# EAGLE board Car (EAGLE 7.4.0)
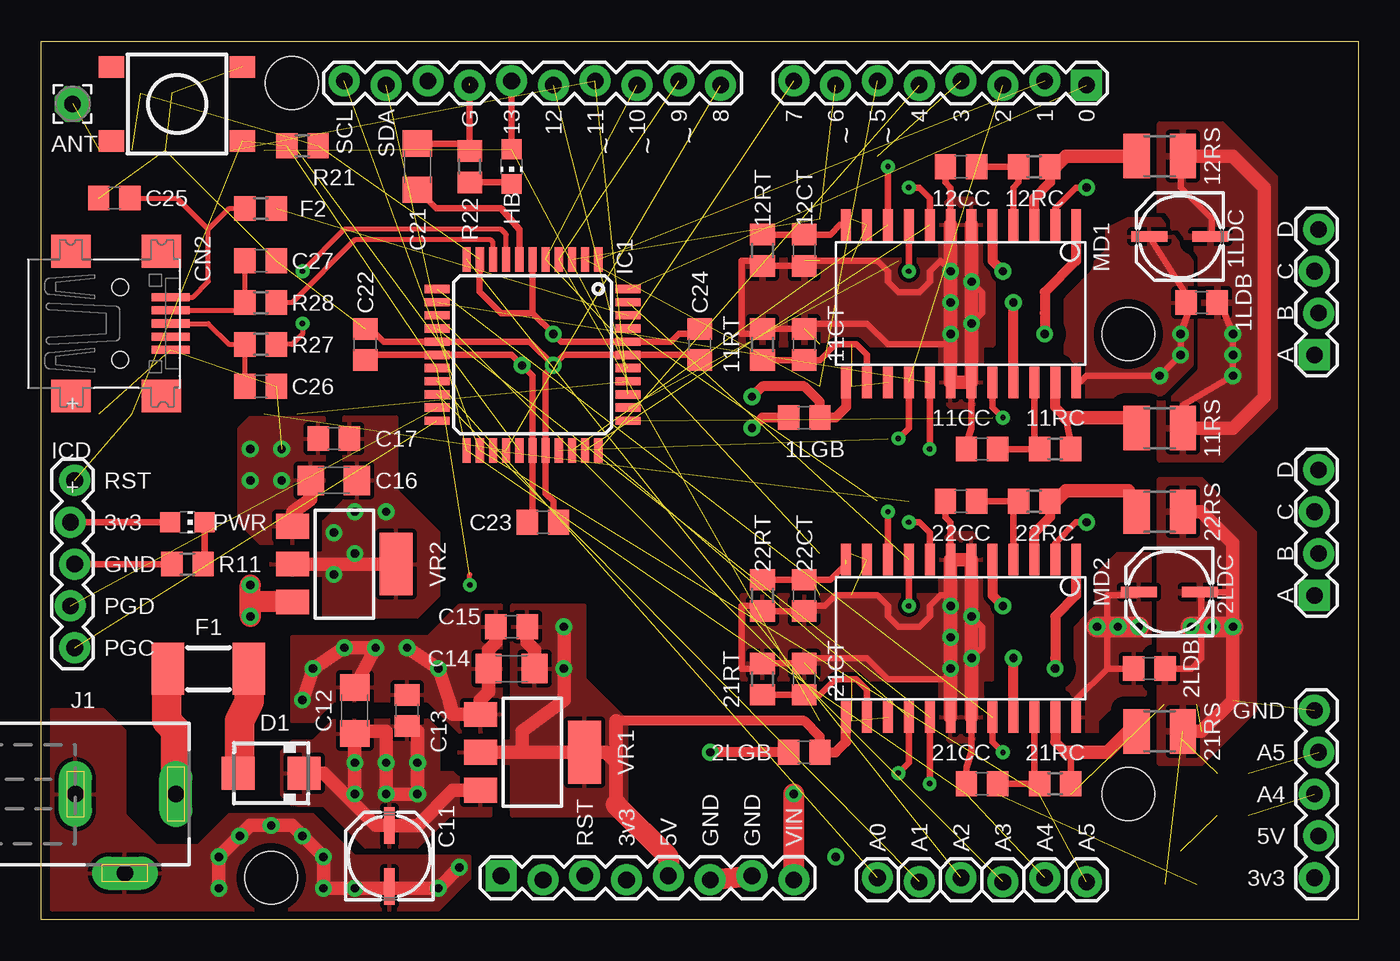
[diagram p0: board, top side]
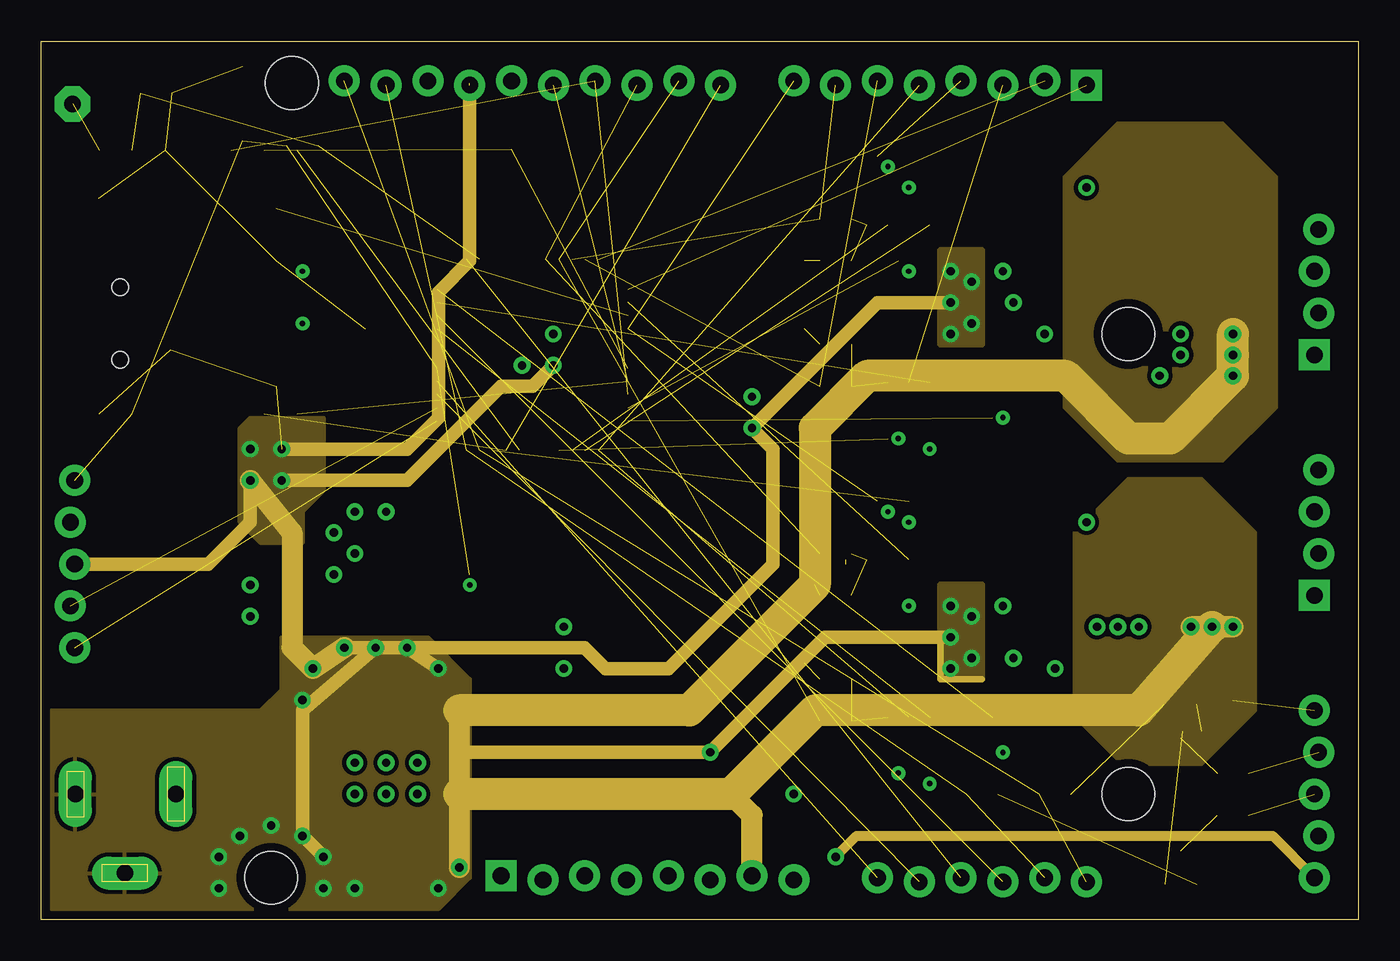
[diagram p1: board, inner layer Route2]
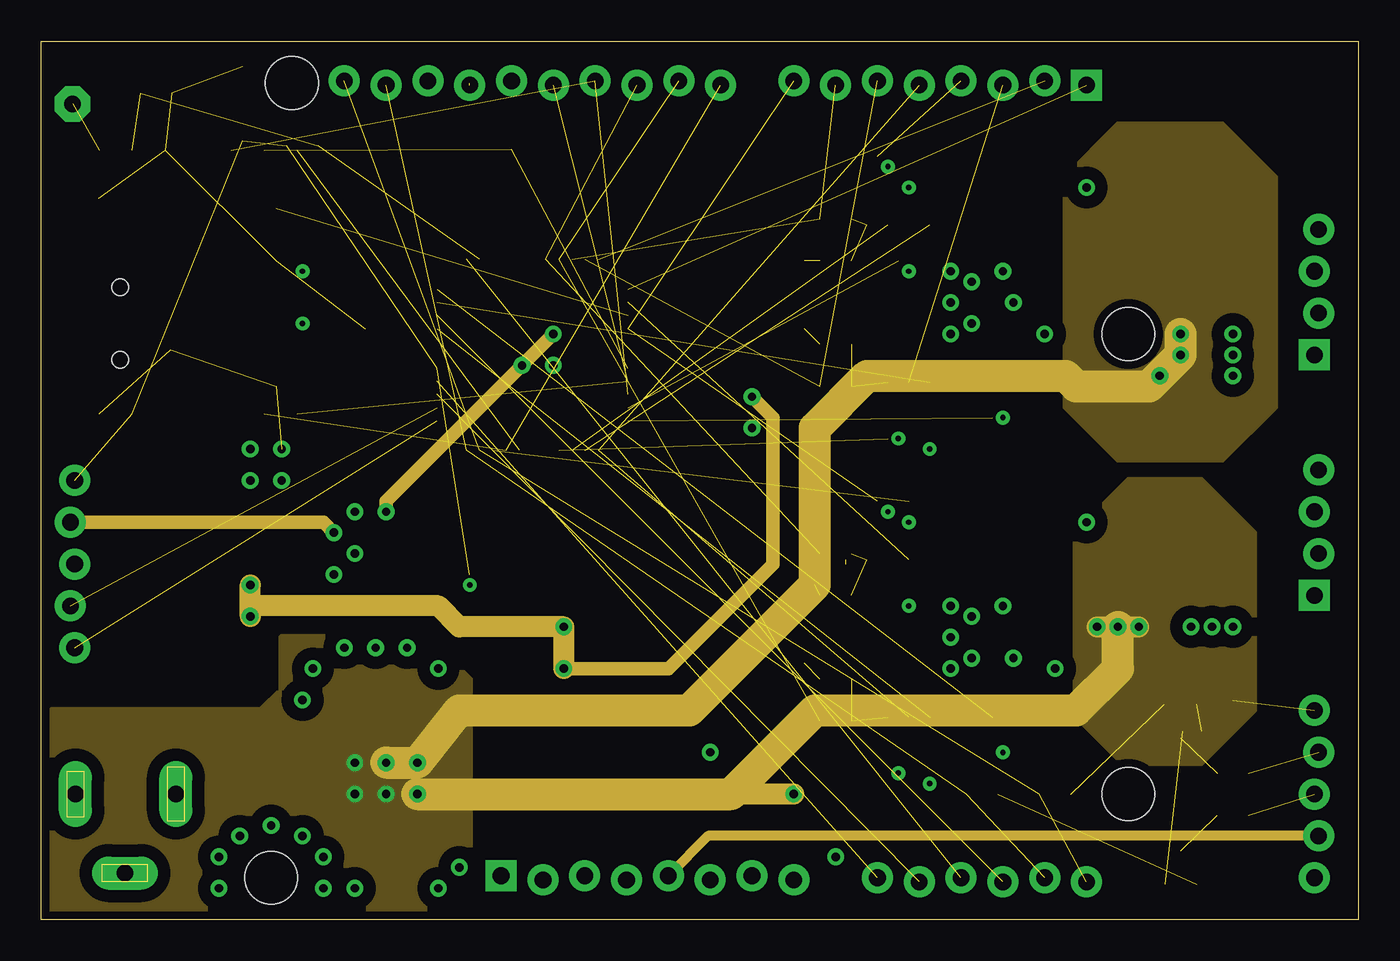
[diagram p2: board, inner layer Route15]
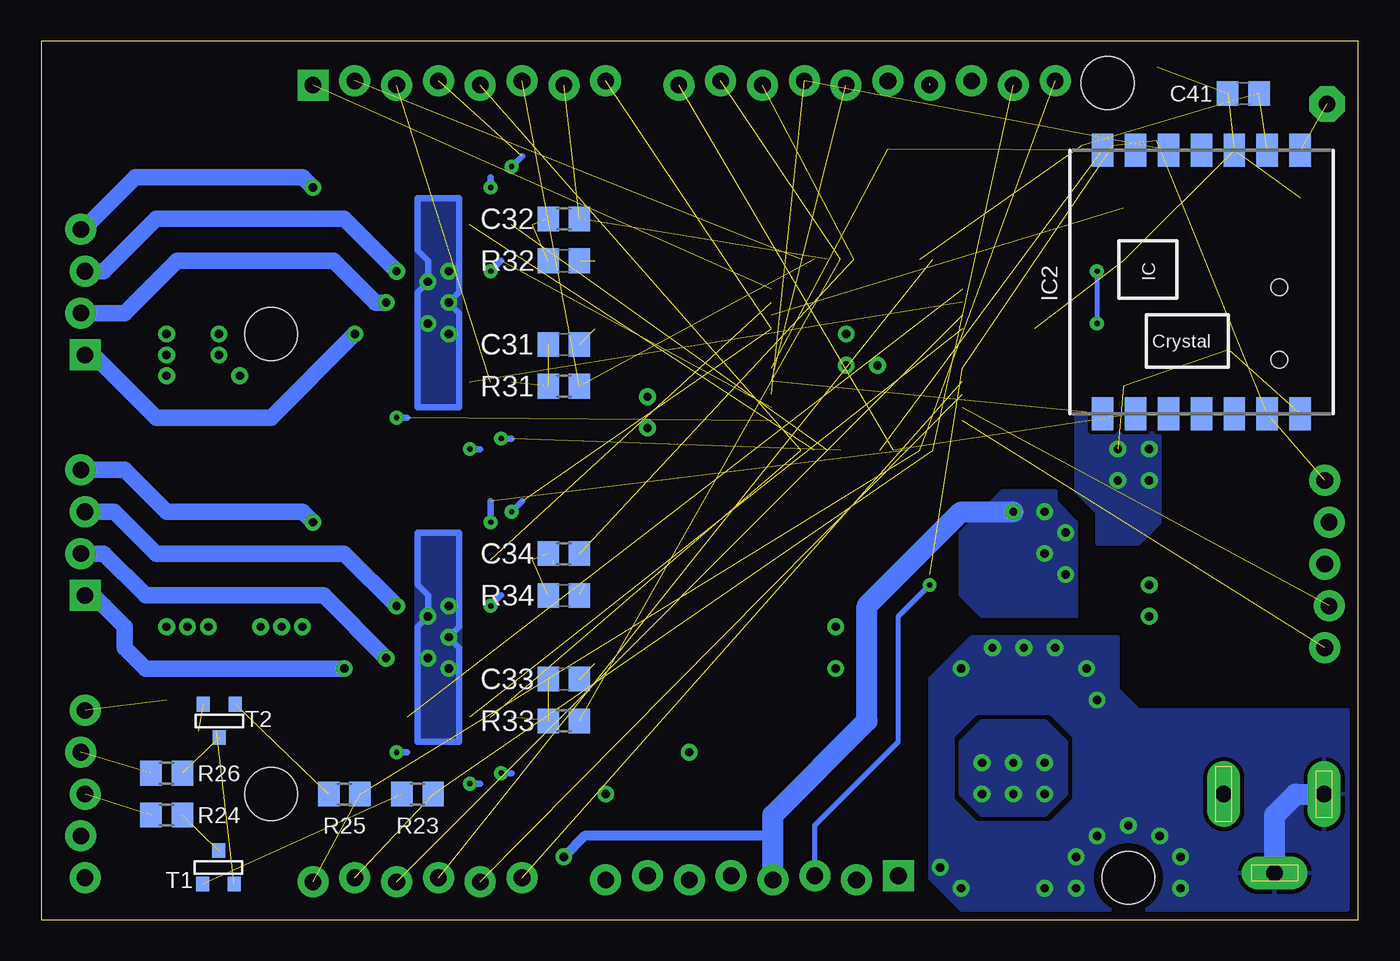
[diagram p3: board, bottom side, seen from below]

Size 80.01 x 53.34 mm. Coordinates in mm from the lower left corner, seen from the top.
Outline: 0,53.34 80.01,53.34 80.01,0 0,0 0,53.34
Copper layers (1*2*15*16): Top 0.035559375mm / dielectric 0.17018125mm / Route2 0.01778125mm / dielectric 47mil / Route15 0.01778125mm / dielectric 0.17018125mm / Bottom 0.035559375mm
Design rules "Car": minimum track width 12mil, minimum drill 13mil, track to track 10mil, track to pad 10mil, pad to pad 8mil, via to via 10mil, smd to smd 8mil, copper to edge 20mil, drill to drill 10mil, minimum pad ring 10mil, minimum via ring 10mil, stop-mask expansion 3mil, vias tented up to drill 25mil, thermal gap 10mil
Net classes: 1 power: width 0.762 mm, drill 0.508 mm, clearance 0.762 mm; 2 ground: width 0.508 mm, drill 0.381 mm
Holes 3.2 mm at 15.24,50.8 13.97,2.54 66.04,35.56 66.04,7.62

## Footprints (pad centres in the part's own frame; a part is rotated, then mirrored left to right if it is on the bottom)
C0805 = smd 1.3 x 1.5: 1 -0.95,0; 2 0.95,0
PANASONIC_C = smd 2.2 x 0.65: + 1.9,-0.2; - -1.8,-0.2
R0805 = smd 1.3 x 1.5: 1 -0.95,0; 2 0.95,0
R1210 = smd 1.6 x 2.7: 1 -1.4,0; 2 1.4,0
1X06_LOCK = drill 1.016 pad 1.88: 1 0,0; 2 2.54,-0.254; 3 5.08,0; 4 7.62,-0.254; 5 10.16,0; 6 12.7,-0.254
2,15/1,0 = drill 1.016 pad 2.159 octagon: 1 0,0
C1206 = smd 1.6 x 1.8: 1 -1.4,0; 2 1.4,0
USB-MINIB = smd 0.5 x 2.308: D+ 0,4.064; D- -0.8,4.064; GND 1.6,4.064; ID 0.8,4.064; VBUS -1.6,4.064 | smd 2 x 2.4: GND1 -4.4,-2; GND2 -4.4,3.5; GND3 4.4,3.5; GND4 4.4,-2 | hole 1: -2.2,1; 2.2,1
SMA = smd 2 x 2: A 2,0; C -2,0
1X08_LOCK = drill 1.016 pad 1.88 square: 1 0,0.127 | drill 1.016 pad 1.88: 2 2.54,-0.127; 3 5.08,0.127; 4 7.62,-0.127; 5 10.16,0.127; 6 12.7,-0.127; 7 15.24,0.127; 8 17.78,-0.127
1X10_LOCK = drill 1.016 pad 1.88: 1 0,0.127; 2 2.54,-0.127; 3 5.08,0.127; 4 7.62,-0.127; 5 10.16,0.127; 6 12.7,-0.127; 7 15.24,0.127; 8 17.78,-0.127; 9 20.32,0.127; 10 22.86,-0.127
2SMD-24X06 = smd 1.956 x 3.15: P$1 -2.464,0; P$2 2.464,0
0805 = smd 1.3 x 1.5: 1 -0.95,0; 2 0.95,0
CHIP-LED0805 = smd 1.2 x 1.2: A 0,-1.05; C 0,1.05
TQFP44 = smd 1.5 x 0.5: 1 -5.8,4; 2 -5.8,3.2; 3 -5.8,2.4; 4 -5.8,1.6; 5 -5.8,0.8; 6 -5.8,0; 7 -5.8,-0.8; 8 -5.8,-1.6; 9 -5.8,-2.4; 10 -5.8,-3.2; 11 -5.8,-4; 23 5.8,-4; 24 5.8,-3.2; 25 5.8,-2.4; 26 5.8,-1.6; 27 5.8,-0.8; 28 5.8,0; 29 5.8,0.8; 30 5.8,1.6; 31 5.8,2.4; 32 5.8,3.2; 33 5.8,4 | smd 0.5 x 1.5: 12 -4,-5.8; 13 -3.2,-5.8; 14 -2.4,-5.8; 15 -1.6,-5.8; 16 -0.8,-5.8; 17 0,-5.8; 18 0.8,-5.8; 19 1.6,-5.8; 20 2.4,-5.8; 21 3.2,-5.8; 22 4,-5.8; 34 4,5.8; 35 3.2,5.8; 36 2.4,5.8; 37 1.6,5.8; 38 0.8,5.8; 39 0,5.8; 40 -0.8,5.8; 41 -1.6,5.8; 42 -2.4,5.8; 43 -3.2,5.8; 44 -4,5.8
RFM12-XXX-S2 = smd 2 x 1.3: 1 -8.01,6.01; 2 -8.01,4.01; 3 -8.01,2.01; 4 -8.01,0.01; 5 -8.01,-1.99; 6 -8.01,-3.99; 7 -8.01,-5.99; 8 7.99,-5.99; 9 7.99,-3.99; 10 7.99,-1.99; 11 7.99,0.01; 12 7.99,2.01; 13 7.99,4.01; 14 7.99,6.01
1X05_LOCK = drill 1.016 pad 1.88: 1 0,0.127; 2 2.54,-0.127; 3 5.08,0.127; 4 7.62,-0.127; 5 10.16,0.127
DCJ0303 = drill 1 pad 2 long: 1 0,3.1; 2 4.8,0; 3 0,-3
1X04_LOCK = drill 1.016 pad 1.88 square: 1 0,0.127 | drill 1.016 pad 1.88: 2 2.54,-0.127; 3 5.08,0.127; 4 7.62,-0.127
SOP24L = smd 0.6 x 1.9: 1 -6.986,-4.717; 2 -5.716,-4.717; 3 -4.446,-4.717; 4 -3.176,-4.717; 5 -1.906,-4.717; 6 -0.636,-4.717; 7 0.634,-4.717; 8 1.904,-4.717; 9 3.174,-4.717; 10 4.444,-4.717; 11 5.714,-4.717; 12 6.984,-4.717; 13 6.984,4.843; 14 5.714,4.843; 15 4.444,4.843; 16 3.174,4.843; 17 1.904,4.843; 18 0.634,4.843; 19 -0.636,4.843; 20 -1.906,4.843; 21 -3.176,4.843; 22 -4.446,4.843; 23 -5.716,4.843; 24 -6.986,4.843
TACTILE_SWITCH_TALL = smd 1.55 x 1.3: A1 -3.975,-2.25; A2 3.975,-2.25; B1 -3.975,2.25; B2 3.975,2.25
SOT-23 = smd 0.787 x 0.889: 1 0.025,-1.016; 2 -0.94,1.016; 3 0.991,1.016
SOT223 = smd 1.5 x 2: 1 -2.3,-3.15; 2 0,-3.15; 3 2.3,-3.15 | smd 3.8 x 2: 4 0,3.15

## Placement (x,y rotation side)
1LDB  100n  [C0805]  70.48,37.47 0 top
1LDC  100u  [PANASONIC_C]  69.22,41.27 180 top
1LGB  100n  [C0805]  46.35,30.48 180 top
2LDB  100n  [C0805]  67.31,15.24 0 top
2LDC  100u  [PANASONIC_C]  68.58,19.68 180 top
2LGB  100n  [C0805]  46.35,10.16 180 top
11CC  1n  [C0805]  57.15,28.57 180 top
11CT  1n  [C0805]  46.35,34.92 90 top
11RC  2k  [R0805]  61.59,28.57 0 top
11RS  0.5  [R1210]  67.94,29.84 180 top
11RT  22k  [R0805]  43.81,34.92 270 top
12CC  1n  [C0805]  55.88,45.72 180 top
12CT  1n  [C0805]  46.35,40.64 270 top
12RC  2k  [R0805]  60.33,45.72 180 top
12RS  0.5  [R1210]  67.94,46.35 180 top
12RT  22k  [R0805]  43.81,40.64 90 top
21CC  1n  [C0805]  57.15,8.26 180 top
21CT  1n  [C0805]  46.35,14.61 90 top
21RC  2k  [R0805]  61.59,8.26 180 top
21RS  0.5  [R1210]  67.94,11.43 180 top
21RT  22k  [R0805]  43.81,14.61 270 top
22CC  1n  [C0805]  55.88,25.4 180 top
22CT  1n  [C0805]  46.35,19.68 270 top
22RC  2k  [R0805]  60.33,25.4 0 top
22RS  0.5  [R1210]  67.94,24.77 180 top
22RT  22k  [R0805]  43.81,19.68 90 top
AIO  [1X06_LOCK]  50.8,2.54 0 top
ANT  ANT  [2,15/1,0]  1.91,49.53 0 top
C11  100u  [PANASONIC_C]  20.95,3.81 90 top
C12  10u  [C1206]  19.05,12.7 90 top
C13  100n  [C0805]  22.23,12.7 90 top
C14  10u  [C1206]  28.57,15.24 180 top
C15  100n  [C0805]  28.57,17.78 180 top
C16  10u  [C1206]  17.78,26.67 180 top
C17  100n  [C0805]  17.78,29.21 180 top
C21  10u  [C1206]  22.86,45.72 90 top
C22  100n  [C0805]  19.68,34.92 90 top
C23  100n  [C0805]  30.48,24.13 0 top
C24  100n  [C0805]  40.01,34.92 270 top
C25  10n  [C0805]  4.45,43.81 180 top
C26  47p  [C0805]  13.34,32.38 0 top
C27  47p  [C0805]  13.34,40.01 0 top
C31  100n  [C0805]  48.26,34.92 0 bottom
C32  100n  [C0805]  48.26,40.01 0 bottom
C33  100n  [C0805]  48.26,14.61 0 bottom
C34  100n  [C0805]  48.26,19.68 0 bottom
C41  100n  [C0805]  6.99,50.16 180 bottom
CN2  [USB-MINIB]  3.81,36.2 270 top
D1  [SMA]  13.97,8.89 180 top
DIO1  [1X08_LOCK]  63.5,50.8 180 top
DIO2  [1X10_LOCK]  41.27,50.8 180 top
F1  FUSE24X06  [2SMD-24X06]  10.16,15.24 0 top
F2  FERRITE0805  [0805]  13.34,43.18 0 top
HB  LED  [CHIP-LED0805]  28.57,45.72 180 top
IC1  PIC24FJ64GB204  [TQFP44]  29.84,34.29 270 top
IC2  RFM12  [RFM12-XXX-S2]  9.53,38.73 90 bottom
ICD  [1X05_LOCK]  1.91,26.67 270 top
J1  [DCJ0303]  5.08,7.62 270 top
M1  [1X04_LOCK]  77.47,34.29 90 top
M2  [1X04_LOCK]  77.47,19.68 90 top
MD1  MTS62C19A  [SOP24L]  55.88,37.47 180 top
MD2  MTS62C19A  [SOP24L]  55.88,17.14 180 top
PIO  [1X05_LOCK]  77.47,2.54 90 top
PWR  LED  [CHIP-LED0805]  8.89,24.13 270 top
PWR_IN  [1X08_LOCK]  27.94,2.54 0 top
R11  2k  [R0805]  8.89,21.59 180 top
R21  10k  [R0805]  15.88,46.99 180 top
R22  2k  [R0805]  26.04,45.72 90 top
R23  10k  [R0805]  57.15,7.62 180 bottom
R24  100  [R0805]  72.39,6.35 180 bottom
R25  10k  [R0805]  61.59,7.62 180 bottom
R26  100  [R0805]  72.39,8.89 180 bottom
R27  27  [R0805]  13.34,34.92 0 top
R28  27  [R0805]  13.34,37.47 0 top
R31  10k  [R0805]  48.26,32.38 180 bottom
R32  10k  [R0805]  48.26,42.55 180 bottom
R33  10k  [R0805]  48.26,12.06 180 bottom
R34  10k  [R0805]  48.26,22.23 180 bottom
S1  SWITCH-MOMENTARY-2SMD-4  [TACTILE_SWITCH_TALL]  8.26,49.53 0 top
T1  2N3904  [SOT-23]  69.22,3.17 180 bottom
T2  2N3904  [SOT-23]  69.22,12.06 0 bottom
VR1  LD117AS50TR  [SOT223]  29.84,10.16 270 top
VR2  LD117AS33TR  [SOT223]  18.41,21.59 270 top

## Library data of the parts
1LDB 1LGB 2LDB 2LGB 11CC 11CT 12CC 12CT 21CC 21CT 22CC 22CT C13 C15 C17 C22-C24 C31-C34 C41 = rcl; PN-DK: 478-1395-1-ND
1LDC 2LDC C11 = SparkFun-Passives
11RC 11RT 12RC 12RT 21RC 21RT 22RC 22RT R11 R21-R26 R31-R34 = rcl
11RS 12RS 21RS 22RS = resistor
AIO DIO1 DIO2 ICD M1 M2 PIO PWR_IN = SparkFun-Connectors
ANT = wirepad
C12 C14 C16 C21 = rcl; PN-DK: 587-2484-1-ND
C25 = rcl; PN-DK: 399-1158-1-ND
C26 C27 = rcl; PN-DK: 399-1117-1-ND
CN2 = adafruit; PN-DK: 151-1206-1-ND
D1 = SmslsTron-1; PN-DK: SBRT5A50SA-13DICT-ND
F1 = SmslsTron-1; PN-DK: F6634CT-ND
F2 = SMSLS; PN-DK: 490-1054-1-ND
HB PWR = led
IC1 = microchip; MPN: PIC24FJ64GA004-E/PT; OC_FARNELL: 1332299; OC_NEWARK: 98M1927
IC2 = SparkFun-RF
J1 = con-jack; PN-DK: CP-102AH-ND
MD1 MD2 = microchip
R27 R28 = resistor; PN-DK: 311-27.0CRCT-ND
S1 = SmslsTron-1; PROD_ID: SWCH-11966
T1 T2 = SmslsTron-1; MPN: DSS20201L-7; PN-DK: MMBT2222A-FDICT-ND
VR1 VR2 = v-reg

## Nets
+3V3: C16.1 C17.1 C22.1 C23.1 C24.1 C41.1 IC1.6 IC1.10 IC1.17 IC1.28 IC1.40 IC2.9 ICD.2 PIO.1 PWR.A PWR_IN.4 R21.1 VR2.2 VR2.4
+5V: 1LGB.1 2LGB.1 C14.1 C15.1 MD1.13 MD2.13 PIO.2 PWR_IN.5 VR1.2 VR1.4 VR2.3
/RST: IC1.18 IC2.6 ICD.1 PWR_IN.3 R21.2 S1.A2
A0: AIO.1 IC1.19
A1: AIO.2 IC1.20
A2: AIO.3 IC1.11
A3: AIO.4 IC1.14
A4/SDA: AIO.5 DIO2.9 IC1.23 R23.1
A4_PO: PIO.3 R24.2
A5/SCL: AIO.6 DIO2.10 IC1.24 R25.1
A5_PO: PIO.4 R26.2
D0/RXD: DIO1.1 IC1.44
D1/TXD: DIO1.2 IC1.1
D2/M1_P1: DIO1.3 IC1.30 MD1.16
D3/M1_P2: DIO1.4 IC1.31 MD1.10
D4/M2_P1: DIO1.5 IC1.33 MD2.16
D5/M1_PWM1: DIO1.6 IC1.2 R31.1
D6/M1_PWM2: DIO1.7 IC1.3 R32.1
D7/M2_P2: DIO1.8 IC1.41 MD2.10
D8/RFM_IRQ: DIO2.1 IC1.26 IC2.2
D9/M2_PWM1: DIO2.2 IC1.4 R33.1
D10/M2_PWM2: DIO2.3 IC1.5 R34.1
D11/MOSI: DIO2.4 IC1.36 IC2.12
D12/MISO: DIO2.5 IC1.37 IC2.1
D13/SCLK: DIO2.6 HB.A IC1.38 IC2.13
GND: 1LDB.2 1LDC.- 1LGB.2 2LDB.2 2LDC.- 2LGB.2 11CC.2 11CT.2 11RS.1 11RT.1 12CC.2 12CT.2 12RS.1 12RT.1 21CC.2 21CT.2 21RS.1 21RT.1 22CC.2 22CT.2 22RS.1 22RT.1 C11.- C12.2 C13.2 C14.2 C15.2 C16.2 C17.2 C21.2 C22.2 C23.2 C24.2 C25.2 C26.2 C27.2 C31.2 C32.2 C33.2 C34.2 C41.2 CN2.GND DIO2.7 IC1.16 IC1.29 IC1.39 IC2.7 IC2.10 ICD.3 J1.2 J1.3 MD1.6 MD1.7 MD1.18 MD1.19 MD2.6 MD2.7 MD2.18 MD2.19 PIO.5 PWR_IN.6 PWR_IN.7 R11.2 R22.2 S1.B2 T1.2 T2.2 VR1.1 VR2.1
M1_I01: IC1.34 MD1.20
M1_I02: IC1.32 MD1.8
M1_I11: IC1.13 MD1.17
M1_I12: IC1.35 MD1.9
M1_VREF1: C31.1 MD1.15 R31.2
M1_VREF2: C32.1 MD1.11 R32.2
M2_I01: IC1.12 MD2.20
M2_I02: IC1.25 MD2.8
M2_I11: IC1.15 MD2.17
M2_I12: IC1.43 MD2.9
M2_VREF1: C33.1 MD2.15 R33.2
M2_VREF2: C34.1 MD2.11 R34.2
N$1 [power]: M1.2 MD1.21
N$2 [power]: M1.1 MD1.1
N$3: D1.A F1.P$2
N$4 [power]: M1.3 MD1.5
N$5 [power]: M1.4 MD1.2
N$6 [power]: M2.2 MD2.21
N$7: R24.1 T1.1
N$8 [power]: M2.1 MD2.1
N$9 [power]: M2.3 MD2.5
N$10 [power]: M2.4 MD2.2
N$11: ANT.1 IC2.8
N$12: R26.1 T2.1
N$13 [power]: 21RC.1 21RS.2 MD2.23
N$14: 21CC.1 21RC.2 MD2.22
N$15: 22CT.1 22RT.2 MD2.12
N$16 [power]: 22RC.2 22RS.2 MD2.3
N$17: 22CC.1 22RC.1 MD2.4
N$18: 21CT.1 21RT.2 MD2.14
N$19: R23.2 T1.3
N$20: R25.2 T2.3
N$21: C26.1 CN2.D+ R27.1
N$22: C27.1 CN2.D- R28.1
N$31 [power]: 11RC.2 11RS.2 MD1.23
N$33: 11CC.1 11RC.1 MD1.22
N$34: 12CC.1 12RC.2 MD1.4
N$35 [power]: 12RC.1 12RS.2 MD1.3
N$40: C21.1 IC1.7
N$41: 11CT.1 11RT.2 MD1.14
N$42: 12CT.1 12RT.2 MD1.12
N$46: HB.C R22.1
N$65: PWR.C R11.1
PGC: IC1.22 ICD.5
PGD: IC1.21 ICD.4
RFM_CS: IC1.27 IC2.14
USBD+: IC1.8 R27.2
USBD-: IC1.9 R28.2
VBUS: F2.2 IC1.42
VBUS-PRF: C25.1 CN2.VBUS F2.1
VIN [power]: 1LDB.1 1LDC.+ 2LDB.1 2LDC.+ C11.+ C12.1 C13.1 D1.C MD1.24 MD2.24 PWR_IN.8 VR1.3
VIN_PRF: F1.P$1 J1.1

## Tracks (layer width: path | path; a pad name or v marks a point on that pad's centre or on a via)
+3V3  (via drill 0.51)  (3 unrouted)
  Top 0.406: ICD.2 PWR.A | C24.1 39.69,35.56 38.73,35.56 38.27,35.09 IC1.40 31.59,35.09 v31.11,35.56 29.84,36.83 | C23.1 29.84,24.45 IC1.28 29.84,33.02 v29.21,33.66 28.57,34.29 IC1.17 20,34.29 C22.1 | 29.84,36.83 IC1.6 | IC1.10 26.64,38.12 27.94,36.83 29.84,36.83
  Top 0.813: VR2.2 VR2.4
  Route2 0.61: v48.26,3.81 49.53,5.08 74.8,5.08 PIO.1
  Route15 0.813: ICD.2 17.14,24.13 v17.78,23.5 | v20.95,24.77 20.95,25.4 v29.21,33.66 v31.11,35.56
  Bottom 0.406: 35.56,1.91 35.56,5.08
  Bottom 0.61: 35.56,5.08 46.99,5.08 v48.26,3.81
  Bottom 0.813: PWR_IN.4 35.56,1.91
  Bottom 1.27: PWR_IN.4 35.56,5.08 35.56,6.35 29.84,12.06 29.84,19.05 24.13,24.77 v20.95,24.77
  other vias: 19.05,24.77 17.78,20.95 19.05,22.23
  pour Top (rank 3): 13.97,22.23 13.97,20.95 17.14,20.95 17.14,18.41 22.86,18.41 24.13,19.68 24.13,23.5 21.59,26.04 21.59,30.48 18.41,30.48 18.41,25.4 17.14,24.13 17.14,22.23
  pour Bottom (rank 3): 17.14,24.13 17.14,18.41 22.86,18.41 24.13,19.68 24.13,23.5 21.59,26.04 18.41,26.04 18.41,25.4
+5V  (via drill 0.51)
  Top 0.61: 34.92,12.06 46.35,12.06 47.3,11.11 2LGB.1 48.26,10.16 48.9,10.79 MD2.13 | v43.18,31.75 43.81,32.38 46.35,32.38 47.3,31.43 1LGB.1 48.26,30.48 48.9,31.12 MD1.13
  Top 0.813: VR1.2 29.21,10.16 | 29.21,10.16 VR1.4 34.29,10.16 34.92,9.53 | C15.1 29.52,16.83 29.98,16.38 C14.1 | 34.92,6.99 34.92,9.53 | 34.92,12.06 34.92,9.53 | 29.21,10.16 29.21,11.43 31.75,13.34 v31.75,15.24 v31.75,17.78
  Top 1.27: 34.92,6.99 38.1,3.81 PWR_IN.5 | VR2.3 12.94,19.29 12.7,19.05 v12.7,18.41 v12.7,20.32
  Route15 0.61: PIO.2 40.51,5.08 PWR_IN.5
  Route15 0.813: v31.75,15.24 38.1,15.24 44.45,21.59 44.45,30.48 v43.18,31.75
  Route15 1.27: v12.7,20.32 v12.7,18.41 12.7,19.05 24.13,19.05 25.4,17.78 v31.75,17.78 v31.75,15.24
  pour Top: 25.4,10.79 25.4,9.53 28.57,9.53 28.57,6.35 35.56,6.35 35.56,12.06 33.02,14.61 33.02,19.05 28.57,19.05 28.57,10.79
/RST  (via drill 0.33)  (5 unrouted)
  Top 0.305: v26.04,20.32 26.04,20.95
  Bottom 0.305: PWR_IN.3 33.02,5.71 27.94,10.79 27.94,18.41 v26.04,20.32
A0  (1 unrouted)
A1  (1 unrouted)
A2  (1 unrouted)
A3  (1 unrouted)
A4/SDA  (3 unrouted)
A4_PO  (1 unrouted)
A5/SCL  (3 unrouted)
A5_PO  (1 unrouted)
D0/RXD  (1 unrouted)
D1/TXD  (1 unrouted)
D2/M1_P1  (via drill 0.33 pad 0.38)  (2 unrouted)
  Top 0.406: MD1.16 52.71,29.85 v52.07,29.21
  Bottom 0.406: v52.07,29.21 51.44,29.21
D3/M1_P2  (via drill 0.33 pad 0.38)  (2 unrouted)
  Top 0.406: MD1.10 v51.44,45.72
  Bottom 0.406: v51.44,45.72 50.8,46.35
D4/M2_P1  (via drill 0.33)  (2 unrouted)
  Top 0.406: MD2.16 52.71,9.53 v52.07,8.89
  Bottom 0.406: v52.07,8.89 51.44,8.89
D5/M1_PWM1  (2 unrouted)
D6/M1_PWM2  (2 unrouted)
D7/M2_P2  (via drill 0.33)  (2 unrouted)
  Top 0.406: MD2.10 51.44,24.13 v51.44,24.77
  Bottom 0.406: v51.44,24.77 50.8,25.4
D8/RFM_IRQ  (2 unrouted)
D9/M2_PWM1  (2 unrouted)
D10/M2_PWM2  (2 unrouted)
D11/MOSI  (2 unrouted)
D12/MISO  (2 unrouted)
D13/SCLK  (2 unrouted)
  Top 0.406: HB.A DIO2.6
GND  (via drill 0.51)  (16 unrouted)
  Top 0.406: MD2.7 55.25,24.13 54.93,24.45 22CC.2 | 56.52,12.06 56.52,10.16 56.2,9.21 21CC.2 | 21RT.1 21CT.2 46.35,15.88 50.16,15.88 51.44,14.61 55.24,14.61 v55.24,17.14 | 22RT.1 22CT.2 | 72.39,19.68 72.19,19.89 2LDC.- 70.48,19.78 70.48,15.88 69.85,15.24 2LDB.2 | 11RT.1 11CT.2 46.35,36.2 50.16,36.2 51.44,34.92 55.24,34.92 v55.24,37.47 | R11.2 ICD.3 | DIO2.7 R22.2 25.59,47.12 C21.2 | C24.2 39.69,34.29 IC1.39 31.75,34.29 v31.11,33.66 | C23.2 31.11,24.45 31.11,25.4 30.64,25.87 IC1.29 30.64,33.19 v31.11,33.66 | C22.2 20,35.56 20.32,35.56 20.79,35.09 IC1.16 29.68,35.09 v31.11,33.66 | 11CC.2 56.2,28.89 56.52,29.84 MD1.19 | 11RS.1 69.34,31.25 v72.39,33.02 v72.39,34.29 v72.39,35.56 71.75,37.15 1LDB.2 | 12RS.1 69.22,44.95 69.22,44.45 71.12,42.55 71.12,41.58 1LDC.- | v55.24,39.37 54.61,40.01 53.98,39.37 53.98,38.73 53.34,38.1 52.07,38.1 51.44,38.73 51.44,39.37 50.8,40.01 46.35,40.01 12CT.2 12RT.1 43.81,40.01 42.55,40.01 42.55,35.56 43.81,35.56 | v56.52,38.73 57.15,38.1 57.15,36.83 v56.52,36.2 | 43.81,15.24 42.55,15.24 42.55,19.05 43.81,19.05 | 46.35,19.05 47.62,19.05 48.26,19.68 50.8,19.68 51.44,19.05 51.44,18.41 52.07,17.78 53.34,17.78 53.98,18.41 53.98,19.05 54.61,19.68 55.24,19.68 | v56.52,18.41 57.15,17.78 57.15,16.51 v56.52,15.88 | 12CC.2 54.93,44.77 55.24,44.45 MD1.7
  Top 0.61: 2LGB.2 v40.64,10.16 | 1LGB.2 43.81,30.48 v43.18,29.84
  Top 0.813: C12.2 v20.32,16.51 v18.41,16.51 v16.51,15.24 v15.88,13.34 | 21.05,1.91 v19.05,1.91 v17.14,1.91 v17.14,3.81 v15.88,5.08 15.24,5.71 v13.97,5.71 12.7,5.71 v12.06,5.08 v10.79,3.81 v10.79,1.91 | 21.05,1.91 C11.- | C15.2 27.62,16.83 27.18,16.38 C14.2 27.18,13.84 26.67,13.34 26.7,12.68 VR1.1 25,12.46 24.77,13.34 v24.13,15.24 v22.23,16.51 | MD2.18 MD2.7 MD2.6 MD2.19 | MD1.7 MD1.18 MD1.19 MD1.6 | 21RS.1 70.48,11.43 72.39,13.34 v72.39,17.78 72.39,22.86 70.48,24.77 22RS.1 | v25.4,3.17 v24.13,1.91 21.05,1.91 | VR2.1 15.27,24.74 16.38,25.53 C16.2 | 11RS.1 72.39,29.84 74.3,31.75 74.3,44.45 72.39,46.35 12RS.1
  Top 1.27: v69.85,17.78 v72.39,17.78 v71.12,17.78 | PWR_IN.6 PWR_IN.7
  Route2 0.406: 57.15,14.61 54.61,14.61 54.61,17.14
  Route2 0.813: v20.32,16.51 15.88,12.7 v15.88,5.08 v17.14,3.81 | v18.41,16.51 v20.32,16.51 | v20.32,16.51 v22.23,16.51 | 25.4,10.16 v40.64,10.16 47.62,17.14 54.61,17.14 v55.24,17.14 | v24.13,15.24 v22.23,16.51 | v22.23,16.51 33.02,16.51 34.29,15.24 38.1,15.24 44.45,21.59 44.45,28.57 v43.18,29.84 50.8,37.47 v55.24,37.47 | ICD.3 10.16,21.59 12.7,24.13 v12.7,26.67 | v14.61,26.67 22.23,26.67 27.94,32.38 29.84,32.38 v31.11,33.66 | 26.04,50.8 26.04,40.01 24.13,38.1 24.13,30.48 22.23,28.57 v14.61,28.57
  Route2 1.27: 25.4,12.7 25.4,10.16 25.4,7.62 v25.4,3.17 | PWR_IN.7 43.18,6.35 41.91,7.62 | v12.7,26.67 15.24,23.5 15.24,16.51 v16.51,15.24 v18.41,16.51 | v71.12,17.78 v72.39,17.78 v69.85,17.78 v71.12,17.78
  Route2 1.93: v71.12,17.78 66.67,12.7 46.99,12.7 41.91,7.62 25.4,7.62 | 25.4,12.7 39.37,12.7 46.99,20.32 46.99,29.84 50.16,33.02 62.23,33.02 66.04,29.21 68.58,29.21 v72.39,33.02 v72.39,34.29 v72.39,35.56
  Bottom 0.406: v55.24,37.47 54.61,38.1 54.61,43.81 57.15,43.81 57.15,40.64 56.52,40.01 v56.52,38.73 57.15,38.1 57.15,31.11 54.61,31.11 54.61,36.83 v55.24,37.47 | v55.24,17.14 54.61,17.78 54.61,23.5 57.15,23.5 57.15,20.32 56.52,19.68 v56.52,18.41 57.15,17.78 57.15,10.79 54.61,10.79 54.61,16.51 v55.24,17.14
  Bottom 1.27: J1.2 5.08,6.35 3.81,7.62 J1.3
  other vias: 55.24,35.56 55.24,19.05 55.24,15.24 12.7,28.57
  pour Top: 54.61,31.75 54.61,43.18 55.24,43.81 56.52,43.81 57.15,43.18 57.15,31.75 56.52,31.11 55.24,31.11
  pour Top: 54.61,16.51 54.61,22.86 55.24,23.5 56.52,23.5 57.15,22.86 57.15,11.43 56.52,10.79 55.24,10.79 54.61,11.43
  pour Top (rank 2): 23.5,17.14 15.24,17.14 15.24,12.06 16.51,12.06 17.78,13.34 23.5,13.34 25.4,11.43 27.94,11.43 27.94,19.05 25.4,19.05
  pour Bottom (rank 2): 0.64,0.64 0.64,12.7 13.34,12.7 14.61,13.97 14.61,17.14 23.5,17.14 26.04,14.61 26.04,2.54 24.13,0.64
  pour Top (rank 2): 0.64,12.7 0.64,0.64 24.13,0.64 26.04,2.54 26.04,3.81 19.05,3.81 16.51,6.35 11.43,6.35 9.53,4.45 6.99,4.45 5.08,6.35 5.08,11.43 3.81,12.7
  pour Top (rank 2): 67.94,26.67 67.94,9.53 70.48,9.53 73.66,12.7 73.66,23.5 70.48,26.67
  pour Route2 (rank 2): 0.64,0.64 0.64,12.7 13.34,12.7 14.61,13.97 14.61,17.14 23.5,17.14 26.04,14.61 26.04,2.54 24.13,0.64
  pour Top: 42.55,19.68 42.55,14.61 57.78,14.61 57.78,19.68
  pour Top (rank 2): 15.88,22.86 13.34,22.86 12.06,24.13 12.06,29.84 12.7,30.48 17.14,30.48 17.14,26.04 15.88,24.77
  pour Route2 (rank 2): 15.88,22.86 13.34,22.86 12.06,24.13 12.06,29.84 12.7,30.48 17.14,30.48 17.14,26.04 15.88,24.77
  pour Bottom (rank 2): 15.88,22.86 13.34,22.86 12.06,24.13 12.06,29.84 12.7,30.48 17.14,30.48 17.14,26.04 15.88,24.77
  pour Top: 57.78,40.01 42.55,40.01 42.55,34.92 57.78,34.92
  pour Top (rank 2): 67.94,48.26 67.94,27.94 71.75,27.94 74.93,31.11 74.93,45.09 71.75,48.26
  pour Route2 (rank 2): 54.61,20.32 54.61,14.61 57.15,14.61 57.15,20.32
  pour Bottom (rank 2): 54.61,23.5 54.61,10.79 57.15,10.79 57.15,23.5
  pour Route2 (rank 2): 70.48,26.67 66.04,26.67 62.87,23.5 62.87,12.36 65.7,9.53 70.48,9.53 73.66,12.7 73.66,23.5
  pour Bottom (rank 2): 54.61,43.81 54.61,31.11 57.15,31.11 57.15,43.81
  pour Route2 (rank 2): 54.61,40.64 54.61,34.92 57.15,34.92 57.15,40.64
  pour Route2 (rank 2): 71.75,48.26 65.41,48.26 62.23,45.09 62.23,31.11 65.41,27.94 71.75,27.94 74.93,31.11 74.93,45.09
M1_I01  (via drill 0.33 pad 0.38)  (1 unrouted)
  Top 0.406: MD1.20 57.79,31.11 v58.42,30.48
  Bottom 0.406: v58.42,30.48 57.78,30.48
M1_I02  (via drill 0.33 pad 0.38)  (1 unrouted)
  Top 0.406: MD1.8 53.98,43.81 53.34,44.45 v52.7,44.45
  Bottom 0.406: v52.7,44.45 52.7,45.09
M1_I11  (via drill 0.33 pad 0.38)  (1 unrouted)
  Top 0.406: MD1.17 53.98,29.21 v53.98,28.57
  Bottom 0.406: v53.98,28.57 53.34,28.57
M1_I12  (via drill 0.33 pad 0.38)  (1 unrouted)
  Top 0.406: MD1.9 v52.71,39.37 v52.7,39.37
  Bottom 0.406: v52.7,39.37 52.07,40.01
M1_VREF1  (2 unrouted)
M1_VREF2  (2 unrouted)
M2_I01  (via drill 0.33)  (1 unrouted)
  Top 0.406: MD2.20 57.79,10.79 v58.42,10.16
  Bottom 0.406: v58.42,10.16 57.78,10.16
M2_I02  (via drill 0.33)  (1 unrouted)
  Top 0.406: MD2.8 53.98,23.49 53.34,24.13 v52.7,24.13
  Bottom 0.406: v52.7,24.13 52.7,25.4
M2_I11  (via drill 0.33)  (1 unrouted)
  Top 0.406: MD2.17 53.98,8.89 v53.98,8.26
  Bottom 0.406: v53.98,8.26 53.34,8.26
M2_I12  (via drill 0.33)  (1 unrouted)
  Top 0.406: MD2.9 52.71,19.69 v52.7,19.05
  Bottom 0.406: v52.7,19.05 52.07,19.68
M2_VREF1  (2 unrouted)
M2_VREF2  (2 unrouted)
N$1  (via drill 0.51)
  Top 0.61: MD1.21 59.06,36.19 v59.05,37.47
  Bottom 1.016: v59.05,37.47 59.69,37.47 62.23,40.01 71.75,40.01 74.93,36.83 M1.2
N$2  (via drill 0.51)
  Top 0.61: MD1.1 62.87,40.01 60.96,38.1 60.96,36.83 v60.96,35.56
  Bottom 1.016: v60.96,35.56 66.04,30.48 73.03,30.48 76.83,34.29 M1.1
N$3
  Top 1.27: 12.06,8.98 D1.A
  Top 1.778: F1.P$2 12.62,13.26 12.06,12.06 12.06,8.98
N$4  (via drill 0.51)
  Top 0.61: MD1.5 57.79,40 v58.42,39.37
  Bottom 1.016: v58.42,39.37 61.59,42.55 73.03,42.55 76.2,39.37 M1.3
N$5  (via drill 0.51)
  Top 0.406: MD1.2 61.6,43.18 62.87,44.45 v63.5,44.45
  Bottom 0.406: 77.47,42.04 M1.4
  Bottom 1.016: v63.5,44.45 64.14,45.09 74.3,45.09 77.47,41.91 77.47,42.04
N$6  (via drill 0.51)
  Top 0.61: MD2.21 59.06,14.6 v59.05,15.88
  Bottom 1.016: M2.2 76.2,22.23 73.66,19.68 62.87,19.68 v59.05,15.88
N$7  (1 unrouted)
N$8  (via drill 0.51)
  Top 0.61: MD2.1 62.87,19.69 61.6,18.42 61.59,15.88 v61.59,15.24
  Bottom 1.016: M2.1 76.83,19.68 76.2,19.05 74.93,17.78 74.93,16.51 73.66,15.24 v61.59,15.24
N$9  (via drill 0.51)
  Top 0.61: MD2.5 57.79,19.68 v58.42,19.05
  Bottom 1.016: M2.3 75.56,24.77 73.03,22.23 61.59,22.23 v58.42,19.05
N$10  (via drill 0.51)
  Top 0.406: MD2.2 61.6,22.86 62.87,24.13 v63.5,24.13
  Bottom 1.016: M2.4 74.93,27.3 72.39,24.77 64.14,24.77 v63.5,24.13
N$11  (1 unrouted)
N$12  (1 unrouted)
N$13
  Top 0.406: 61.6,10.79 62.55,9.85 21RC.1 | 21RS.2 66.04,11.43
  Top 0.61: MD2.23 61.6,10.79 62.23,10.16
  Top 0.813: 66.04,11.43 64.77,10.16 62.23,10.16
N$14
  Top 0.406: MD2.22 60.33,8.57 21RC.2 21CC.1
N$15  (1 unrouted)
  Top 0.406: 22RT.2 22CT.1 47.94,20.64 48.9,21.59
N$16
  Top 0.61: MD2.3 60.33,23.5 61.27,24.45 22RC.2
  Top 0.813: 22RC.2 61.59,25.4 62.23,26.04 66.04,26.04 22RS.2
N$17
  Top 0.406: 22CC.1 59.05,25.4 | 59.05,25.4 22RC.1 | MD2.4 59.06,25.4 59.05,25.4
N$18
  Top 0.406: 21RT.2 21CT.1 47.31,13.65 48.26,14.61 49.53,14.61 50.16,13.97 MD2.14
N$19  (1 unrouted)
N$20  (1 unrouted)
N$21
  Top 0.305: CN2.D+ 10.16,36.2 11.43,34.92 R27.1 C26.1
N$22
  Top 0.305: CN2.D- 12.38,36.99 R28.1 C27.1
N$31
  Top 0.406: 11RC.2 62.55,28.89 62.23,30.48 | MD1.23
  Top 0.61: 62.23,30.48 61.59,31.11 MD1.23
  Top 0.813: 11RS.2 66.04,30.48 62.23,30.48
N$33
  Top 0.406: MD1.22 60.33,30.48 60.33,28.57 60.65,28.25 11RC.1 11CC.1
N$34
  Top 0.406: MD1.4 59.06,44.45 | 59.06,44.45 59.05,43.81 | 59.06,44.45 59.38,44.77 12RC.2 12CC.1
N$35
  Top 0.61: MD1.3 60.33,43.82 61.27,44.77 12RC.1
  Top 0.813: 12RC.1 61.59,45.72 62.23,46.35 12RS.2
N$40
  Top 0.406: IC1.7 29.05,41.88 27.94,43.18 24,43.18 C21.1
N$41
  Top 0.406: MD1.14 50.16,34.29 49.53,34.92 48.26,34.92 47.31,33.98 11CT.1 11RT.2
N$42
  Top 0.406: 12RT.2 12CT.1 47.94,41.59 48.53,42.18 MD1.12
N$46
  Top 0.406: R22.1 28.48,44.77 HB.C
N$65
  Top 0.406: PWR.C 9.94,21.69 R11.1
PGC  (1 unrouted)
PGD  (1 unrouted)
RFM_CS  (1 unrouted)
USBD+  (via drill 0.33)
  Top 0.305: IC1.8 28.25,41.6 27.94,41.91 18.41,41.91 v15.88,39.37 | v15.88,36.2 15.88,35.56 15.24,34.92 R27.2
  Bottom 0.305: v15.88,39.37 v15.88,36.2
USBD-
  Top 0.305: IC1.9 27.45,41.13 27.3,41.27 19.05,41.27 15.24,37.47 R28.2
VBUS  (1 unrouted)
VBUS-PRF
  Top 0.305: CN2.VBUS 9.22,37.8 10.16,38.73 10.16,41.91 | 10.16,41.91 11.43,43.18 F2.1 | C25.1 8.26,43.81 10.16,41.91
VIN  (via drill 0.51)
  Top 0.406: MD2.24 62.87,13.34 64.77,15.24 | 64.77,15.24 2LDB.1 | 2LDC.+ 66.48,19.68 64.77,19.68 64.77,17.78 64.77,15.24 | 1LDC.+ 69.86,37.46 v69.22,35.56 v69.22,34.29 v67.94,33.02 63.5,33.02 63.1,32.62 MD1.24
  Top 0.813: v19.05,7.62 v19.05,9.53 19.05,11.43 20.95,11.43 v20.95,9.53 v20.95,7.62 v22.86,7.62 v22.86,9.53 22.86,11.43 | D1.C 17.14,8.89 20.32,5.71 C11.+ 22.86,5.71 25,7.86 VR1.3
  Top 1.27: v64.14,17.78 64.77,17.78 v65.41,17.78 v66.67,17.78 | PWR_IN.8 v45.72,7.62
  Route15 1.27: v64.14,17.78 v65.41,17.78 v66.67,17.78 | v45.72,7.62 41.91,7.62
  Route15 1.93: v20.95,9.53 v22.86,9.53 25.4,12.7 39.37,12.7 46.99,20.32 46.99,29.84 50.16,33.02 62.23,33.02 62.87,32.38 67.31,32.38 v67.94,33.02 v69.22,34.29 v69.22,35.56 | v22.86,7.62 41.91,7.62 46.99,12.7 62.87,12.7 65.41,15.24 v65.41,17.78
  pour Top: 17.14,6.99 19.68,4.45 22.86,4.45 24.77,6.35 27.3,6.35 27.3,8.89 24.13,8.89 24.13,11.43 23.5,12.06 17.78,12.06 16.51,10.79 15.24,10.79 14.61,10.16 14.61,7.62 15.24,6.99
  pour Bottom: 17.78,7.62 19.05,6.35 22.86,6.35 24.13,7.62 24.13,10.79 22.86,12.06 19.05,12.06 17.78,10.79
  pour Top: 62.23,10.79 62.23,17.14 64.14,19.05 64.14,20.95 65.41,22.23 67.31,22.23 67.31,13.97 66.67,13.34 65.41,13.34 64.14,12.06 64.14,10.79
  pour Route15: 0.64,12.7 0.64,0.64 24.13,0.64 26.04,2.54 26.04,14.61 23.5,17.14 14.61,17.14 14.61,13.97 13.34,12.7
  pour Top: 62.23,31.75 62.23,38.1 64.77,40.64 64.77,41.91 66.04,42.55 67.94,42.55 69.85,40.01 69.85,33.66 67.94,31.75
  pour Route15 (rank 2): 70.48,26.67 66.04,26.67 62.87,23.5 62.87,12.36 65.7,9.53 70.48,9.53 73.66,12.7 73.66,23.5
  pour Route15 (rank 2): 71.75,48.26 65.41,48.26 62.23,45.09 62.23,31.11 65.41,27.94 71.75,27.94 74.93,31.11 74.93,45.09
VIN_PRF
  Top 1.778: J1.1 8.18,11.51 7.62,12.06 7.62,15.16 F1.P$1

## Text on the board
tPlace: ~ | ~ | ~ | ~ | ~
tNames: SCL | SDA | G | 13 | 12 | 11 | 10 | 9 | 8 | 7 | 6 | 5 | 4 | 3 | 2 | 1 | 0 | D | C | B | A | + | RST | D | + | C | 3v3 | GND | B | A | PGD | PGC | GND | A5 | A4 | 5V | RST | 3v3 | 5V | GND | GND | VIN | A0 | A1 | A2 | A3 | A4 | A5 | 3v3